# Altium PCB PCB1.PcbDoc
Units mil, origin at the board's own origin, x right, y up, seen from the top; angles counter-clockwise.
Board outline 1968.5 x 1968.5 mil, 2 copper layers (Top Layer, Bottom Layer), stack 65.792 mil thick; 54 components, 28 nets, 163 pads, 81 vias.
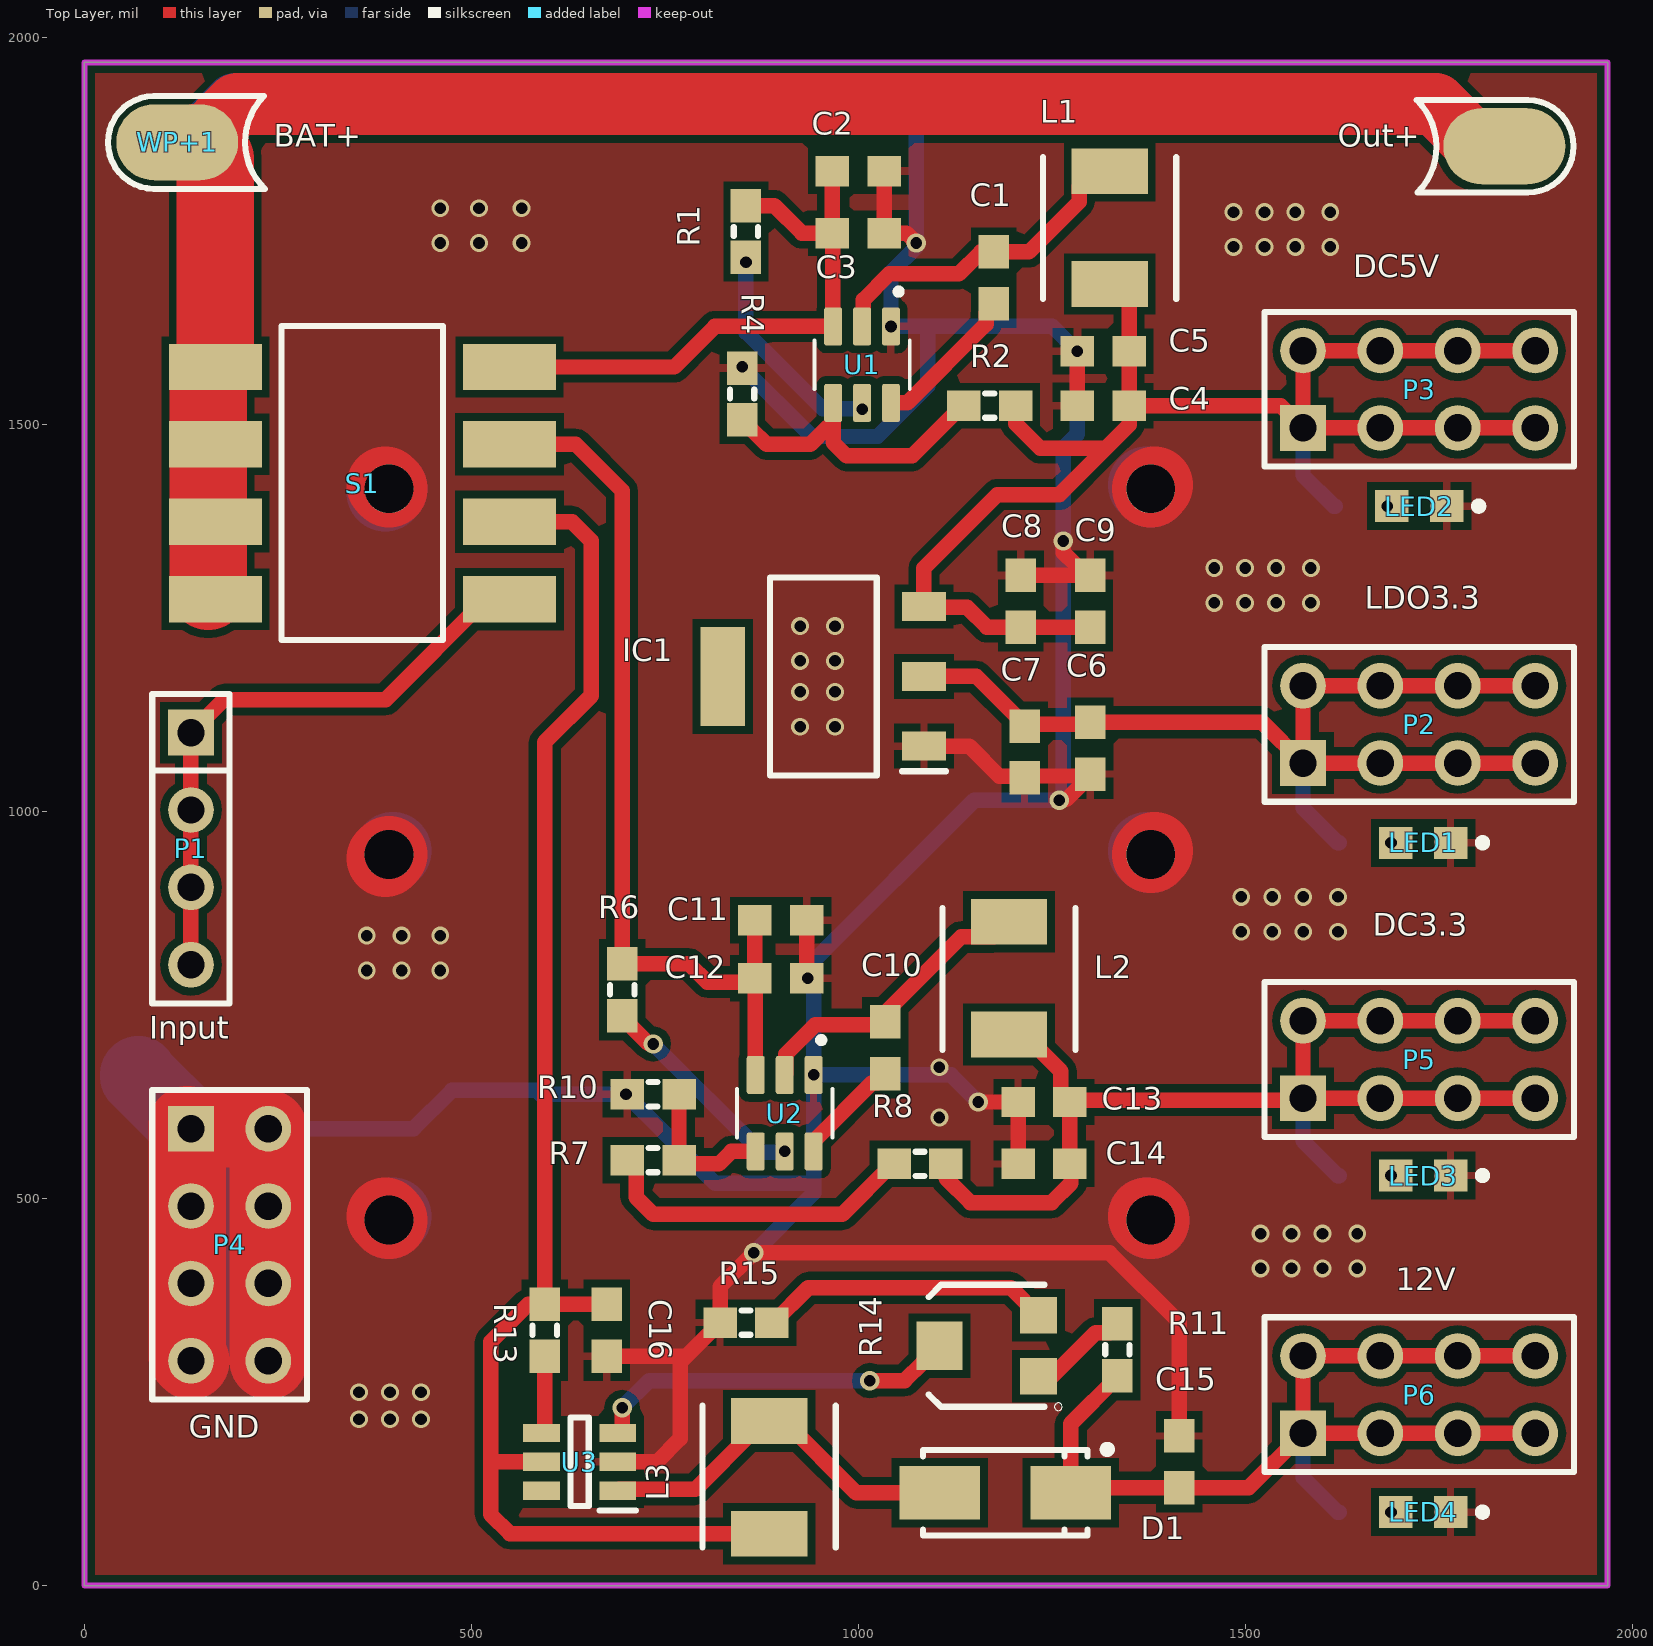
[diagram p0: Top Layer view]
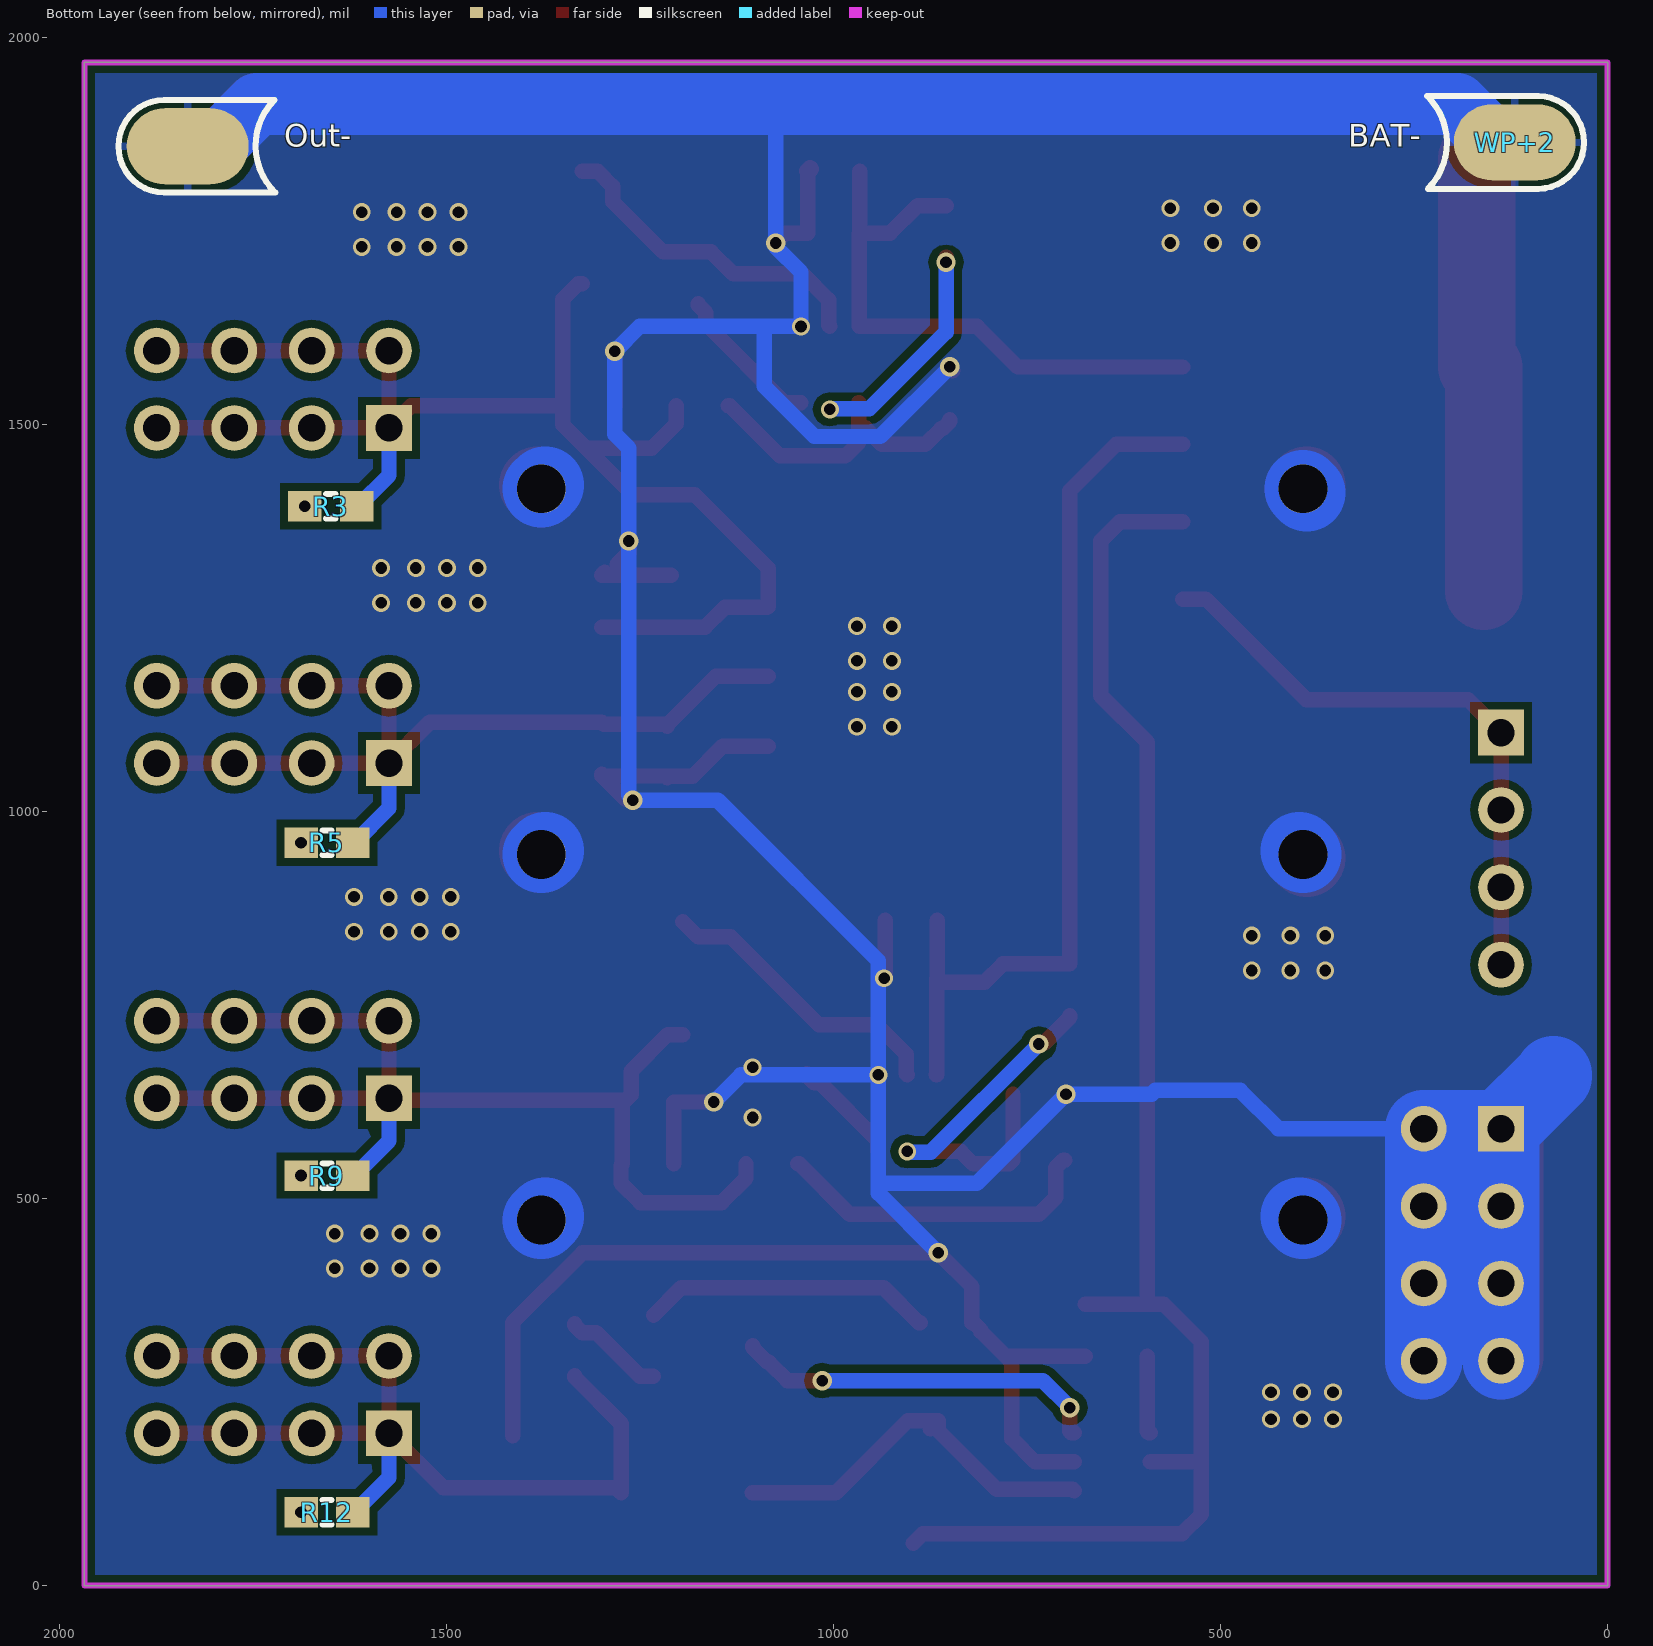
[diagram p1: Bottom Layer view, seen from below]
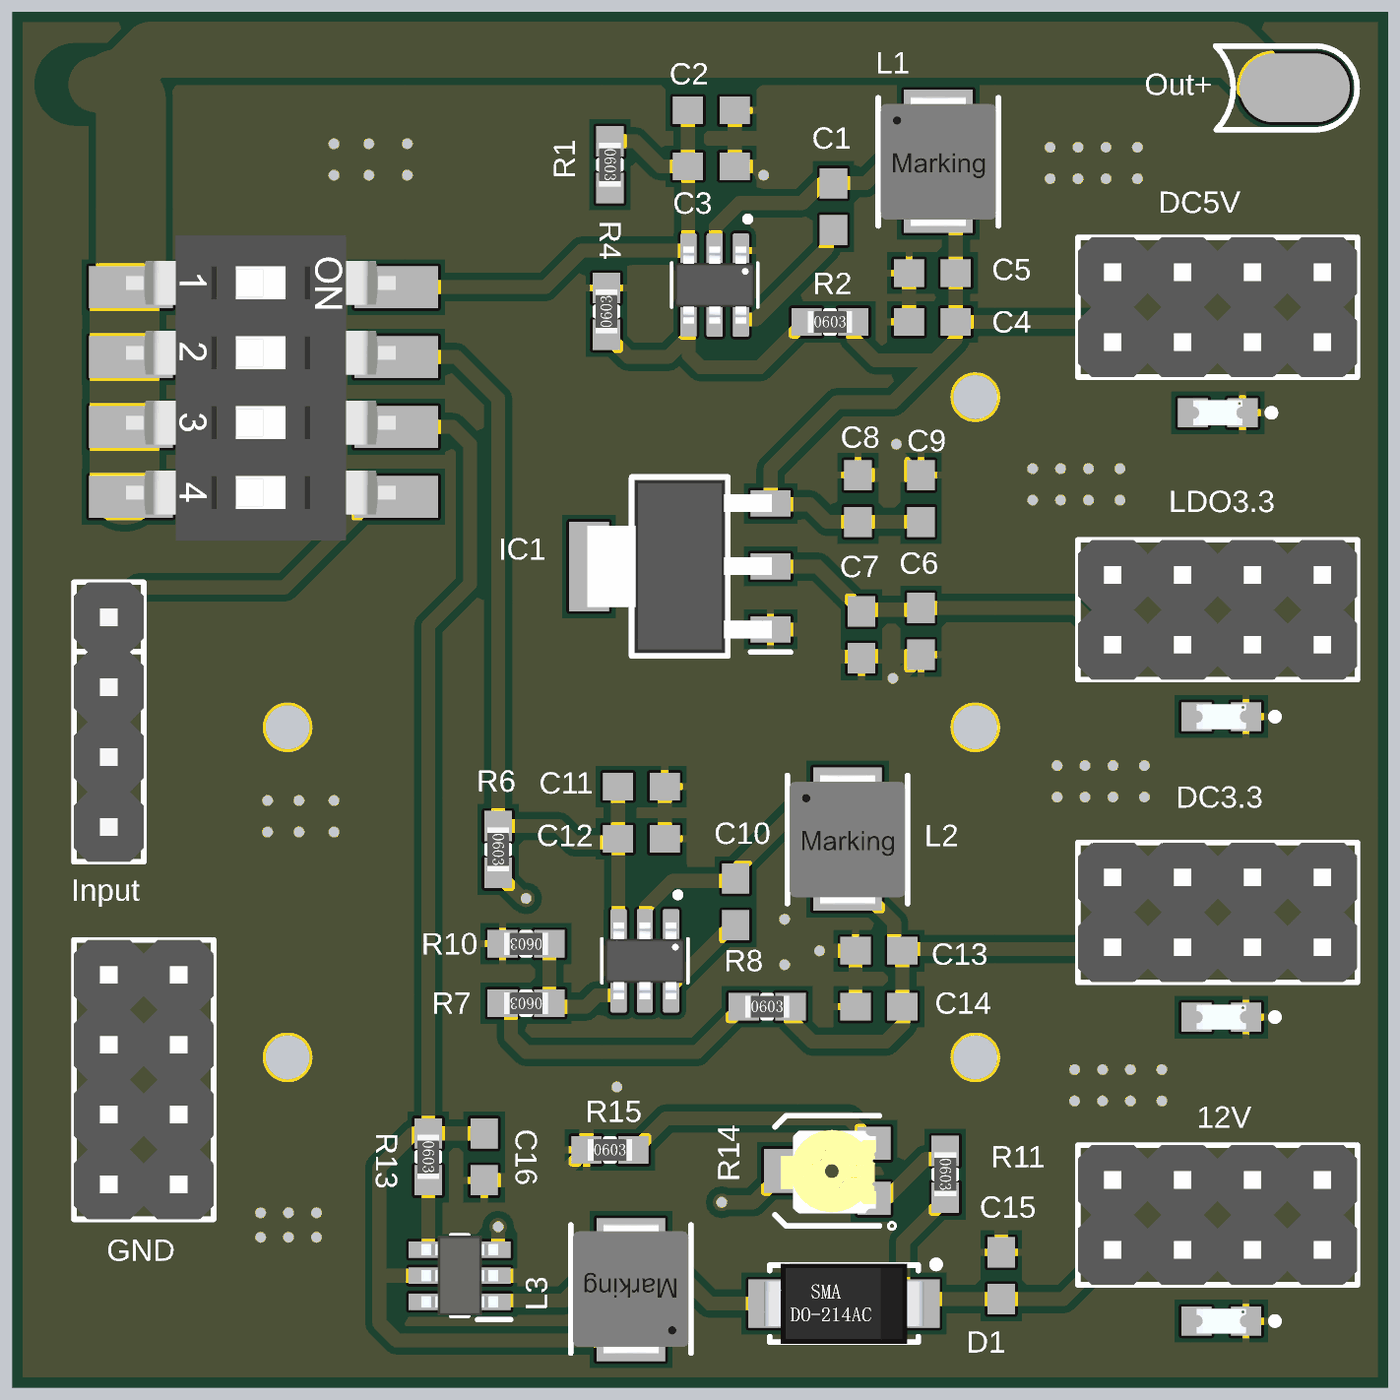
[diagram p2: 3D render of the assembled board from above, using the file's embedded part models]
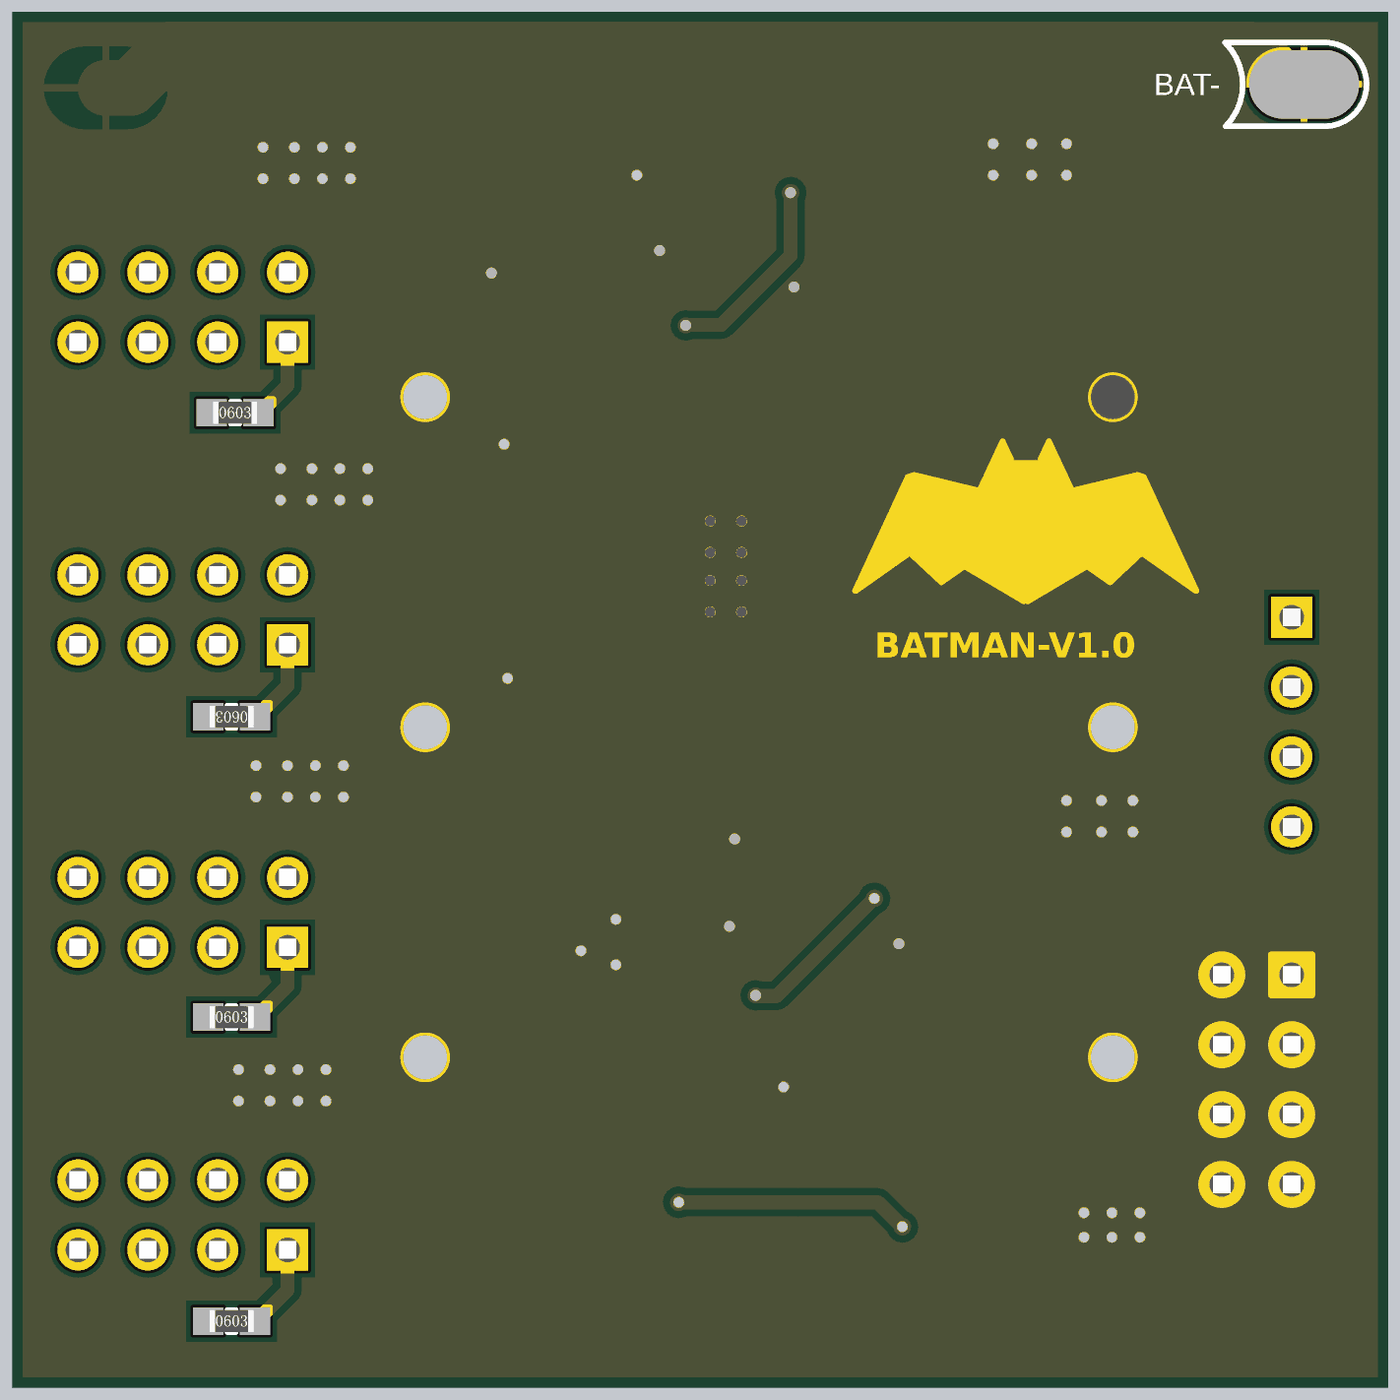
[diagram p3: 3D render of the assembled board from below, using the file's embedded part models]

## Layer stack, top to bottom
Top Solder: solder mask 0.4, Solder Resist, Dk 3.5
Top Layer: signal copper 1.4
Dielectric 1: dielectric 62.9921, FR-4, Dk 4.8
Bottom Layer: signal copper 1.4
Bottom Solder: solder mask 0.4, Solder Resist, Dk 3.5

## Board outline
0,0 0,1968.5 1968.5,1968.5 1968.5,0

## Design rules (kind name [scope] priority, off if disabled: settings)
Clearance [All] p1: gap=10 ignorepadtopadclearanceinfootprint=FALSE except(0: Arc-Hole Track-Hole SMDPad-Hole THPad-Hole Via-Hole Fill-Hole Poly-Hole Region-Hole Text-Hole)
PolygonConnect SameVia [IsVia vs IsPoly] p1: connectstyle=Direct reliefconductorwidth=10 reliefentries=4 polygonreliefangle="90 Angle" airgapwidth=10
PolygonConnect SamePad [IsPad vs IsPoly] p2: connectstyle=Relief reliefconductorwidth=10 reliefentries=4 polygonreliefangle="90 Angle" airgapwidth=10
PolygonConnect [All] p3: connectstyle=Relief reliefconductorwidth=10 reliefentries=4 polygonreliefangle="90 Angle" airgapwidth=10
RoutingVias [All] p1: holewidth=28 width=50 viastyle="Through Hole" minholewidth=6 minwidth=8 maxholewidth=100 maxwidth=100
SolderMaskExpansion [All] p1: expansion=4
Width [All] p1: maxlimit=100 minlimit=6 preferedwidth=10
30 further rules are at their usual default settings.

## Components (designator, comment, footprint, x,y, rotation, side; value= is the part's Value field where it differs from the comment)
C1 "105" CAPC1608[0603] 1175,1690 r90 top
C2 "226" CAPC1608[0603] 1000,1827.76 r0 top
C3 "104" CAPC1608[0603] 1000,1747.76 r0 top
C4 "226" CAPC1608[0603] 1316.54,1525 r180 top
C5 "226" CAPC1608[0603] 1316.54,1595 r180 top
C6 "226" CAPC1608[0603] 1300,1082.24 r90 top
C7 "104" CAPC1608[0603] 1215,1077.24 r90 top
C8 "226" CAPC1608[0603] 1210,1272.24 r90 top
C9 "104" CAPC1608[0603] 1300,1272.24 r90 top
C10 "105" CAPC1608[0603] 1035,695 r90 top
C11 "226" CAPC1608[0603] 900,860 r0 top
C12 "104" CAPC1608[0603] 900,785 r0 top
C13 "226" CAPC1608[0603] 1240,625 r180 top
C14 "226" CAPC1608[0603] 1240,545 r180 top
C15 "226" CAPC1608[0603] 1415,160 r90 top
C16 "226" CAPC1608[0603] 675,330 r270 top
D1 "SS54  5A 40V" SMA[DO-214AC] 1190,120 r0 top
IC1 "AMS1117-3.3" SOT229P700X180-4N 955,1175 r180 top
L1 "6.8uH" WHC0420 1325,1755 r90 top value=22uH
L2 "6.8uH" WHC0420 1195,785 r90 top value=22uH
L3 "6.8uH" WHC0420 885,140 r270 top value=22uH
LED1 "Red" LEDC1608(0603) 1730,960 r180 top locked
LED2 "Red" LEDC1608(0603) 1725,1395 r180 top locked
LED3 "Red" LEDC1608(0603) 1730,530 r180 top locked
LED4 "Red" LEDC1608(0603) 1730,95 r180 top locked
Out+ "BAT+" WirePadSingleSide 1835,783.23 r270 top locked
Out- "BAT-" WirePadSingleSide 1835,2936.77 r90 bottom locked
P1 "Input" HDR1X4 137.8,1102.36 r270 top
P2 "LDO3.3" HDR2X4 1574.8,1062.99 r0 top locked
P3 "DC5V" HDR2X4 1574.8,1496.06 r0 top locked
P4 "GND" HDR2X4 137.8,590.55 r270 top
P5 "DC3.3" HDR2X4 1574.8,629.92 r0 top locked
P6 "12V" HDR2X4 1574.8,196.85 r0 top locked
R1 "100k" RESC1608[0603] 855,1750 r270 top
R2 "43k" RESC1608[0603] 1170,1525 r0 top
R3 "620R" RESC1608[0603] 1650,1395 r180 bottom
R4 "8.2k" RESC1608[0603] 850,1540 r90 top
R5 "330R" RESC1608[0603] 1655,960 r0 bottom
R6 "100k" RESC1608[0603] 695,770 r270 top
R7 "24k" RESC1608[0603] 735,550 r180 top
R8 "1.6k" RESC1608[0603] 1080,545 r0 top
R9 "680R" RESC1608[0603] 1655,530 r180 bottom
R10 "8.2k" RESC1608[0603] 735,635 r180 top
R11 "120k" RESC1608[0603] 1335,305 r270 top
R12 "1k" RESC1608[0603] 1655,95 r180 bottom
R13 "100k" RESC1608[0603] 595,330 r270 top
R14 "5.31k/10k" Rhostat2 1170,310 r180 top
R15 "1k" RESC1608[0603] 855,340 r0 top
S1 "Skey4" Skey4 169.29,1574.8 r0 top
U1 "MP1471" TSOT23-6 1005,1577.76 r270 top
U2 "MP1471" TSOT23-6 905,610.59 r270 top
U3 "SX1308" SOT23-6 640,160 r180 top
WP+1 "BAT+" WirePadSingleSide 120,2941.77 r90 top locked
WP+2 "BAT-" WirePadSingleSide 120,788.23 r270 bottom locked

## Footprints (in the part's own frame and the unit in brackets; to place one, negate y for a bottom-side part, rotate by r counter-clockwise, add the part's x,y. Pads: shape width x height; smd on the part's side, far side on the other; paste and mask are expansions set on the pad)
CAPC1608[0603] [mm] "Chip Capacitor, 2-Leads, Body 1.60x0.80mm, IPC Medium Density"
  rect 1.1x1 smd: 1(-0.85,0) 2(0.85,0)
  body extent -0.88,-0.48 0.87,0.47, height 0.85
HDR1X4 [mm] "Connector; Header; 4 Position"
  rect 1.5x1.5 hole 0.9: 1(0,0)
  round 1.5 hole 0.9: 2(2.54,0) 3(5.08,0) 4(7.62,0)
  silkscreen extent -1.27,-1.27 8.89,1.27, body extent -1.27,-1.27 8.89,1.27, height 8.54
HDR2X4 [mm] "Connector; Header; 4x2 Position"
  rect 1.5x1.5 hole 0.9: 1(0,0)
  round 1.5 hole 0.9: 2(0,2.54) 3(2.54,0) 4(2.54,2.54) 5(5.08,0) 6(5.08,2.54) 7(7.62,0) 8(7.62,2.54)
  silkscreen extent -1.27,-1.27 8.89,3.81, body extent -1.27,-1.27 8.89,3.81, height 8.54
LEDC1608(0603) [mm] "LED,Chip;1.60mm L X 0.80mm W X 0.80mm H"
  rect 1.1x1.05 smd: A(0.9,0) C(-0.9,0)
  silkscreen extent -2.08,-0.12 -1.83,0.12, body extent -0.9,-0.45 0.9,0.45, height 0.8
RESC1608[0603] [mm] "Chip Resistor, 2-Leads, Body 1.60x0.82mm, IPC Medium Density"
  rect 1.1x1 smd: 1(-0.85,0) 2(0.85,0)
  silkscreen extent -0.15,-0.4 0.15,0.4, body extent -0.8,-0.4 0.8,0.4, height 0.45
Rhostat2 [mm]
  rect 1.2x1.2 smd: 1(-1.6,1) 2(-1.6,-1)
  rect 1.5x1.6 smd: 3(1.65,0)
  silkscreen extent -2.38,-2 2,2.13, body extent -1.67,-1.49 1.78,1.54, height 1.55
Skey4 [mil]
  rect 120x60 smd: 1(0,0) 2(0,-100) 3(0,-200) 4(0,-300) 5(380,-300) 6(380,-200) 7(380,-100) 8(380,0)
  silkscreen extent 86,-353 294,53, body extent -7,-363 379,75, height 171
SMA[DO-214AC] [mm] "Molded Diode, 2-Leads, Body 5.00x2.49mm, IPC Medium Density"
  rect 2.65x1.75 smd: A(-2.15,0) K(2.15,0)
  silkscreen extent -2.7,-1.4 3.48,1.55, body extent -2.9,-1.46 2.91,1.46, height 2.3
SOT23-6 [mm]
  rect 1.2x0.6 smd: 1(-1.25,0.95) 2(-1.25,0) 3(-1.25,-0.95) 4(1.25,-0.95) 5(1.25,0) 6(1.25,0.95)
  silkscreen extent -1.85,-1.45 0.3,1.6, body extent -1.4,-1.45 1.4,1.45, height 1.45
SOT229P700X180-4N [mm]
  rect 1.45x0.95 smd: 1(-3.3,2.29) 2(-3.3,0) 3(-3.3,-2.29)
  rect 1.45x3.25 smd: 4(3.3,0)
  silkscreen extent -4.03,-3.25 1.75,3.25, body extent -3.35,-3.15 3.35,3.15, height 1.8
TSOT23-6 [mm]
  rrect25% 1.25x0.59 smd: 1(-1.255,0.95) 2(-1.255,0) 3(-1.255,-0.95) 4(1.255,-0.95) 5(1.255,0) 6(1.255,0.95)
  silkscreen extent -2.5,-1.57 0.8,1.57, body extent -1.4,-1.45 1.4,1.45, height 1
WHC0420 [mm] "4.4mm 4.2mm 2mm"
  rect 1.5x2.5 smd: 1(-1.85,0) 2(1.85,0)
  silkscreen extent -2.35,-2.18 2.31,2.18, body extent -2.37,-2.1 2.33,2.1, height 1.85
WirePadSingleSide [mm] "A single-side pad for soldering wire."
  oval 2.5x4 smd: 1(-27.35,0)
  silkscreen extent -28.87,-2.88 -25.83,2.27

## Part data
C1 C2 C3 C4 C5 C6 C7 C8 C9 C10 C11 C12 C13 C14 C15 C16: library part "Cap Chip 1", "Chip Capacitor, PSpice Model", Tolerance=Y5V, Voltage=3V, Price(RMB)=0.000, Published=8-Jun-2000, Publisher="Altium Limited", Revision="July-2002: Re-released for DXP Platform."
D1: library part "Diode SMx", "Molded Diode", Voltage=5A40V, Imax=500mA, PartNumber="SS54  5A 40V", Price(RMB)=0.000, Published=8-Jun-2000, Publisher="Altium Limited", Revision="July-2002: Re-released for DXP Platform."
IC1: "Integrated Circuit", Manufacturer_Name=Advanced, Datasheet Link=https://datasheet.datasheetarchive.com/originals/distributors/Datasheets-28/DSA-550594.pdf, Height=1.8mm, Manufacturer_Part_Number=AMS1117-3.3
L1 L2 L3: library part L
LED1 LED2 LED3 LED4: library part "LED Chip", "Typical Chip LED", Color=Red, Price(RMB)=0.00, Published=8-Jun-2000, Publisher="Altium Limited", Revision="July-2002: Re-released for DXP Platform."
Out+ Out- WP+1 WP+2: library part "Wire Pad", "Wire soldering pad.", Price(RMB)=0.000
P1: library part "Header 4", "Header, 4-Pin", LatestRevisionDate=17-Jul-2002, LatestRevisionNote="Re-released for DXP Platform.", Price(RMB)=0.00, Publisher="Altium Limited"
P2 P3 P4 P5 P6: library part "Header 4X2", "Header, 4-Pin, Dual row", LatestRevisionDate=17-Jul-2002, LatestRevisionNote="Re-released for DXP Platform.", Price(RMB)=0.00, Publisher="Altium Limited"
R1 R2 R3 R4 R5 R6 R7 R8 R9 R10 R11 R12 R13 R15: library part "Res Chip 2p 1", "Chip Resistor, PSpice Model, IPC PCB Library Drawing", Tolerance=5%, Price(RMB)=0.000, Published=8-Jun-2000, Publisher="Altium Limited", Revision="July-2002: Re-released for DXP Platform.", TC1=0, TC2=0
R14: library part Rhostat
U1 U2: "4.7v-16V Input / 16V3A / 500K"
U3: "boost / 1.2MHz / 2V-24V input / up to 28V Output"

## Free pads (board coordinates)
  round 62.99 hole 62.99: 16(393.7,472.44) 16(393.7,944.88) 16(393.7,1417.32) 16(1377.95,472.44) 16(1377.95,944.88) 16(1377.95,1417.32)

## Via types
v1: diameter 23, hole 15, Top Layer to Bottom Layer, tented both sides, 69 vias
v2: diameter 25, hole 15, Top Layer to Bottom Layer, tented both sides, 12 vias

## Nets (pads, with @x,y where several pads share a name; then routed paths per layer and width w, separated by ;. In a path a pad name is that pad's centre, name@x,y a point inside that pad or via, vN(x,y) a via of type N, cw(c..) or ccw(c..) an arc to the next point about the centre after c; other vN are vias at no path point)
12V: C15.1 D1.K P6.1 P6.2 P6.3 P6.4 P6.5 P6.6 P6.7 P6.8 R11.2 R12.2 | length 1330.9
  Top Layer w20: R11.2 1335,269.57 1274.65,209.21 D1.K 1281.18,126.54 C15.1 1504.49,126.54 P6.1 ; P6.7 P6.5 P6.3 P6.1 ; P6.8 P6.6 P6.4 P6.2 P6.1
  Bottom Layer w20: P6.1 1574.8,139.76 1619.57,95 R12.2
12VIn: C16.1 L3.2 R13.1 S1.6 U3.5 | length 1974.8
  Top Layer w20: S1.6 630.2,1374.8 655,1350 655,1150 595,1090 R13.1 ; U3.5 527.72,160 525,162.72 ; C16.1 R13.1 ; L3.2@897.17,55 L3.2 550,67.17 525,92.17 525,162.72 ; 525,162.72 525,315 573.46,363.46 R13.1
+5V: C4.1 C5.1 C8.1 C9.1 IC1.3 L1.1 P3.1 P3.2 P3.3 P3.4 P3.5 P3.6 P3.7 P3.8 R2.2 R3.2 | length 2022.6
  Top Layer w20: R2.2 1203.46,1501.54 1235,1470 1320,1470 ; C9.1 C8.1 1166.22,1238.78 1140.94,1264.06 1086.02,1264.06 IC1.3 1084.92,1314.92 1180,1410 1260,1410 1320,1470 ; L1.1 1330.47,1682.17 1350,1662.64 C5.1 C4.1 ; P3.7 P3.5 P3.3 P3.1 ; P3.8 P3.6 P3.4 P3.2 P3.1 ; 1320,1470 1350,1500 C4.1 ; C4.1 1545.87,1525 P3.1
  Bottom Layer w20: P3.1 1574.8,1434.76 1614.57,1395 R3.2
DC3.3In: C11.1 C12.1 R6.1 S1.7 U2.3 | length 1165.8
  Top Layer w20: S1.7 635.2,1474.8 695,1415 R6.1 781.54,803.46 805,780 861.54,780 C12.1 ; C11.1 C12.1 ; U2.3 867.07,660.53 867.07,784.47 C12.1
DC3.3V: C13.1 C14.1 L2.1 P5.1 P5.2 P5.3 P5.4 P5.5 P5.6 P5.7 P5.8 R8.2 R9.2 | length 1565.2
  Top Layer w20: R8.2 1113.46,526.54 1145,495 1250,495 1275,520 1275,543.46 C14.1 C13.1 ; L2.1 1214.69,712.17 1261.81,665.04 1261.81,634.69 1271.5,625 C13.1 ; P5.7 P5.5 P5.3 P5.1 ; P5.8 P5.6 P5.4 P5.2 P5.1 ; C13.1 1275.93,627.46 1572.34,627.46 P5.1
  Bottom Layer w20: P5.1 1574.8,574.76 1619.57,530 R9.2
DC5VIn: C2.1 C3.1 R1.1 S1.8 U1.3 | length 766.3
  Top Layer w20: S1.8 762.48,1574.8 814.84,1627.17 966.54,1627.17 967.07,1627.7 967.07,1747.22 C3.1 ; R1.1 891.54,1783.46 927.24,1747.76 C3.1 ; C2.1 C3.1
GND: C2.2 C3.2 C4.2 C5.2 C6.1 C7.1 C8.2 C9.2 C11.2 C12.2 C13.2 C14.2 C15.2 C16.2 IC1.1 LED1.C LED2.C LED3.C LED4.C Out-.1 P4.1 P4.2 P4.3 P4.4 P4.5 P4.6 P4.7 P4.8 pad.16 R4.2 R10.2 R15.1 U1.1 U2.1 U3.2 WP+2.1 | length 8751.7
  Top Layer w20: C16.2 778.07,296.54 ; U3.2 740,160 770,190 770,288.46 778.07,296.54 ; v2(700,635) R10.2 ; R4.2@846.54,1570 R4.2 ; C12.2 C11.2 ; C2.2 C3.2 1062.24,1747.76 v2(1075,1735) ; IC1.1 1143.46,1084.84 1182.56,1045.75 1215,1045.75 C7.1 1217.5,1046.28 1297.5,1046.28 C6.1 1300,1046.81 1269.15,1015.96 1260.96,1015.96 v2(1260,1015) ; v2(1155,625) C13.2 C14.2 ; C8.2 C9.2 C9.2@1295.96,1309.75 ; v2(1265,1350) 1265,1335 1280,1320 ; C4.2 v2(1283.07,1595) ; C15.2 1415,340 1325,430 v2(865,430) 821.54,386.54 R15.1 819.57,340 809.88,330.31 809.88,328.35 778.07,296.54
  Top Layer w23: C2.2@1030.38,1830.84 C2.2
  Top Layer w100: P4.7 132.8,295.55 132.8,595.55 P4.1 P4.2 P4.4 P4.6 P4.8 ; pad.16@388.7,477.44 pad.16@393.7,472.44 ; pad.16@388.7,939.88 pad.16@393.7,944.88 ; pad.16@388.7,1422.32 pad.16@393.7,1417.32 ; pad.16@1372.95,477.44 pad.16@1377.95,472.44 ; pad.16@1377.95,944.88 pad.16@1382.95,949.88 ; pad.16@1377.95,1417.32 pad.16@1382.95,1422.32
  Bottom Layer w20: P4.2 425.55,590.55 475,640 584.32,640 589.32,635 v2(700,635) 815,520 937.4,520 942.4,525 ; v2(850,1575) 940,1485 1025,1485 1090,1550 1090,1627.17 ; v2(865,430) 942.4,507.4 942.4,525 ; 1075,1914.57 v2(1075,1735) 1075,1730 1042.4,1697.4 v1(1042.4,1627.17) 1090,1627.17 ; v2(1155,625) 1120,660 v1(942.4,660) ; 942.4,525 v1(942.4,660) ; v1(942.4,660) 942.4,807.4 1150,1015 v2(1260,1015) 1260,1016.35 1265,1021.35 v2(1265,1350) 1265,1470 1283.07,1488.07 v2(1283.07,1595) 1250.91,1627.17 1090,1627.17
  Bottom Layer w23: WP+2.1 WP+2.1@125,1870
  Bottom Layer w80: WP+2.1 145,1865 194.57,1914.57 1075,1914.57 1745.43,1914.57 1800,1860 Out-.1
  Bottom Layer w100: 70,660 70,658.35 P4.1 ; P4.7 P4.5 P4.3 P4.1 ; P4.8 P4.6 P4.4 P4.2 P4.1 ; pad.16@388.7,1412.32 pad.16@393.7,1417.32 ; pad.16@393.7,472.44 pad.16@398.7,477.44 ; pad.16@393.7,944.88 pad.16@398.7,949.88 ; pad.16@1372.95,477.44 pad.16@1377.95,472.44 ; pad.16@1372.95,949.88 pad.16@1377.95,944.88 ; pad.16@1372.95,1422.32 pad.16@1377.95,1417.32
  other v1: 355,215 395,215 435,215 355,250 395,250 435,250 1520,410 1560,410 1600,410 1645,410 1520,455 1560,455 1600,455 1645,455 1105,605 1105,670 935,785 365,795 410,795 460,795 365,840 410,840 460,840 1495,845 1535,845 1575,845 1620,845 1495,890 1535,890 1575,890 1620,890 925,1110 970,1110 925,1155 970,1155 925,1195 970,1195 925,1240 970,1240 1460,1270 1500,1270 1540,1270 1585,1270 1460,1315 1500,1315 1540,1315 1585,1315 1485,1730 1525,1730 1565,1730 1610,1730 460,1735 510,1735 565,1735 1485,1775 1525,1775 1565,1775 1610,1775 460,1780 510,1780 565,1780
LDO3.3V: C6.2 C7.2 IC1.2 P2.1 P2.2 P2.3 P2.4 P2.5 P2.6 P2.7 P2.8 R5.1 | length 1365.1
  Top Layer w20: IC1.2 1152.68,1175 1215,1112.68 C7.2 1217.5,1113.21 1297.5,1113.21 C6.2 1522.09,1115.71 P2.1 ; P2.7 P2.5 P2.3 P2.1 ; P2.8 P2.6 P2.4 P2.2 P2.1
  Bottom Layer w20: P2.1 1574.8,1004.76 1619.57,960 R5.1
NetC1_1: C1.1 U1.6 | length 195.4
  Top Layer w20: U1.6 1063.35,1528.35 1165.31,1630.31 1165.31,1644.88 1175,1654.57 C1.1
NetC10_1: C10.1 U2.6 | length 142.9
  Top Layer w20: U2.6 942.4,574.17 1018.11,649.88 1025.31,649.88 1035,659.57 C10.1
NetC10_2: C10.2 L2.2 U2.2 | length 386.8
  Top Layer w20: U2.2 906.61,661.61 906.61,687.02 944.6,725 1019.57,725 1032.5,737.93 1132.87,838.31 1175.47,838.31 L2.2
NetLED1_A: LED1.A R5.2
  other v1: 1688.46,960
NetLED2_A: LED2.A R3.1
  other v1: 1683.46,1395
NetLED3_A: LED3.A R9.1
  other v1: 1688.46,530
NetLED4_A: LED4.A R12.1
  other v1: 1688.46,95
NetR1_2: R1.2 U1.5 | length 288
  Top Layer w20: v2(855,1710) R1.2
  Bottom Layer w20: v2(855,1710) 855,1620 954.04,1520.96 1004.04,1520.96 v1(1005,1520)
NetR6_2: R6.2 U2.5 | length 284.6
  Top Layer w20: R6.2 695,734.57 728.61,700.96 734.04,700.96 v2(735,700)
  Bottom Layer w20: v2(735,700) 874.78,560.22 904.04,560.22 v1(905,561.18)
NetR7_1: R7.1 R10.1 U2.4 | length 192.9
  Top Layer w20: R10.1 R7.1 773.46,545 820,545 836.18,561.18 U2.4
NetR7_2: R7.2 R8.1 | length 423.5
  Top Layer w20: R7.2 703.5,550 713.19,540.31 713.19,501.81 735,480 979.57,480 1044.57,545 R8.1
NetR11_1: R11.1 R14.1 | length 131.3
  Top Layer w20: R14.1 1250.63,270.63 1306.81,326.81 1325.31,326.81 1335,336.5 R11.1
NetR13_2: R13.2 U3.4 | length 102.3
  Top Layer w20: U3.4 593.19,197.4 595,199.21 R13.2
NetR14_2: R14.2 R15.2 | length 377.9
  Top Layer w20: R15.2 890.43,340 935.43,385 1197.36,385 R14.2
Power+: Out+.1 S1.1 S1.2 S1.3 S1.4 WP+1.1 | length 2362
  Top Layer w30: S1.4@160,1284.8 170,1274.8 S1.4
  Top Layer w80: WP+1.1 147.95,1865 197.52,1914.57 1745.92,1914.57 1800.49,1860 Out+.1
  Top Layer w100: WP+1.1@147.95,1865 169.29,1843.66 S1.1 ; S1.4@160,1284.8 S1.1@160,1574.8
Power+In: P1.1 P1.2 P1.3 P1.4 S1.5 | length 782.9
  Top Layer w20: P1.4 P1.3 P1.2 P1.1 180.43,1145 389.49,1145 519.29,1274.8 S1.5
U1_FB: R2.1 R4.1 U1.4 | length 394.7
  Top Layer w20: R4.1 850,1504.57 859.69,1494.88 861.65,1494.88 881.54,1475 938.28,1475 959.66,1496.38 967.6,1496.38 ; U1.4 967.6,1496.38 ; R2.1 1134.57,1525 1069.57,1460 985,1460 967.6,1477.4 967.6,1496.38
U1_SW: C1.2 L1.2 U1.2 | length 433.9
  Top Layer w20: U1.2 1006.61,1628.78 1006.61,1661.61 1040,1695 1130,1695 1158.46,1723.46 C1.2 1220.63,1723.46 1285.79,1788.62 1285.79,1808.31 1305.31,1827.83 L1.2
U3_FB: R14.3 U3.3 | length 481.7
  Top Layer w20: U3.3 693.19,197.4 695,199.21 v2(695,230) ; v2(1015,265) 1060.04,265 1083.54,288.5 1085.51,288.5 1105.04,308.03 R14.3
  Bottom Layer w20: v2(695,230) 730,265 v2(1015,265)
U3_SW: D1.A L3.1 U3.1 | length 513.2
  Top Layer w20: U3.1 691.02,124.41 789.41,124.41 865.31,200.32 L3.1@865.31,212.83 ; L3.1@875.16,202.99 L3.1@865.31,212.83 ; D1.A 997.52,120 904.69,212.83 L3.1 L3.1@865.31,212.83
pads on no net: IC1.4 U3.6

## Polygon pours and split planes (outlines as drawn)
GND on Bottom Layer "Bottom Layer-GND" (solid, remove dead copper, pour order 6): 0,0 1968.5,0 1968.5,1968.5 0,1968.5 0,0
no net on Bottom Layer "Bottom Layer-No Net" (solid, remove dead copper, pour order 2): 625,1730
GND on Top Layer "Top Layer-GND" (solid, remove dead copper, pour order 8): 1968.5,0 1968.5,1968.5 0,1968.5 0,0

## Keep-outs
Keep-Out Layer:
  the board outline again, w7.87

## Silkscreen, mask and mechanical layers (free items; w line width, h text height)
Bottom Solder:
  drawing of 23 lines, arcs and shapes, not listed
  text "BATMAN-V1.0" at 735,1045 h70